# Altium PCB Merge_ESC_Board.PcbDoc (part 2 of 2)
Units mil, origin at the board's own origin, x right, y up, seen from the top; angles counter-clockwise.
Board outline 6950 x 3750 mil, 4 copper layers (Top Layer, Signal Layer 1, Signal Layer 2, Bottom Layer), stack 62.2 mil thick; 151 components, 93 nets, 546 pads, 134 vias.
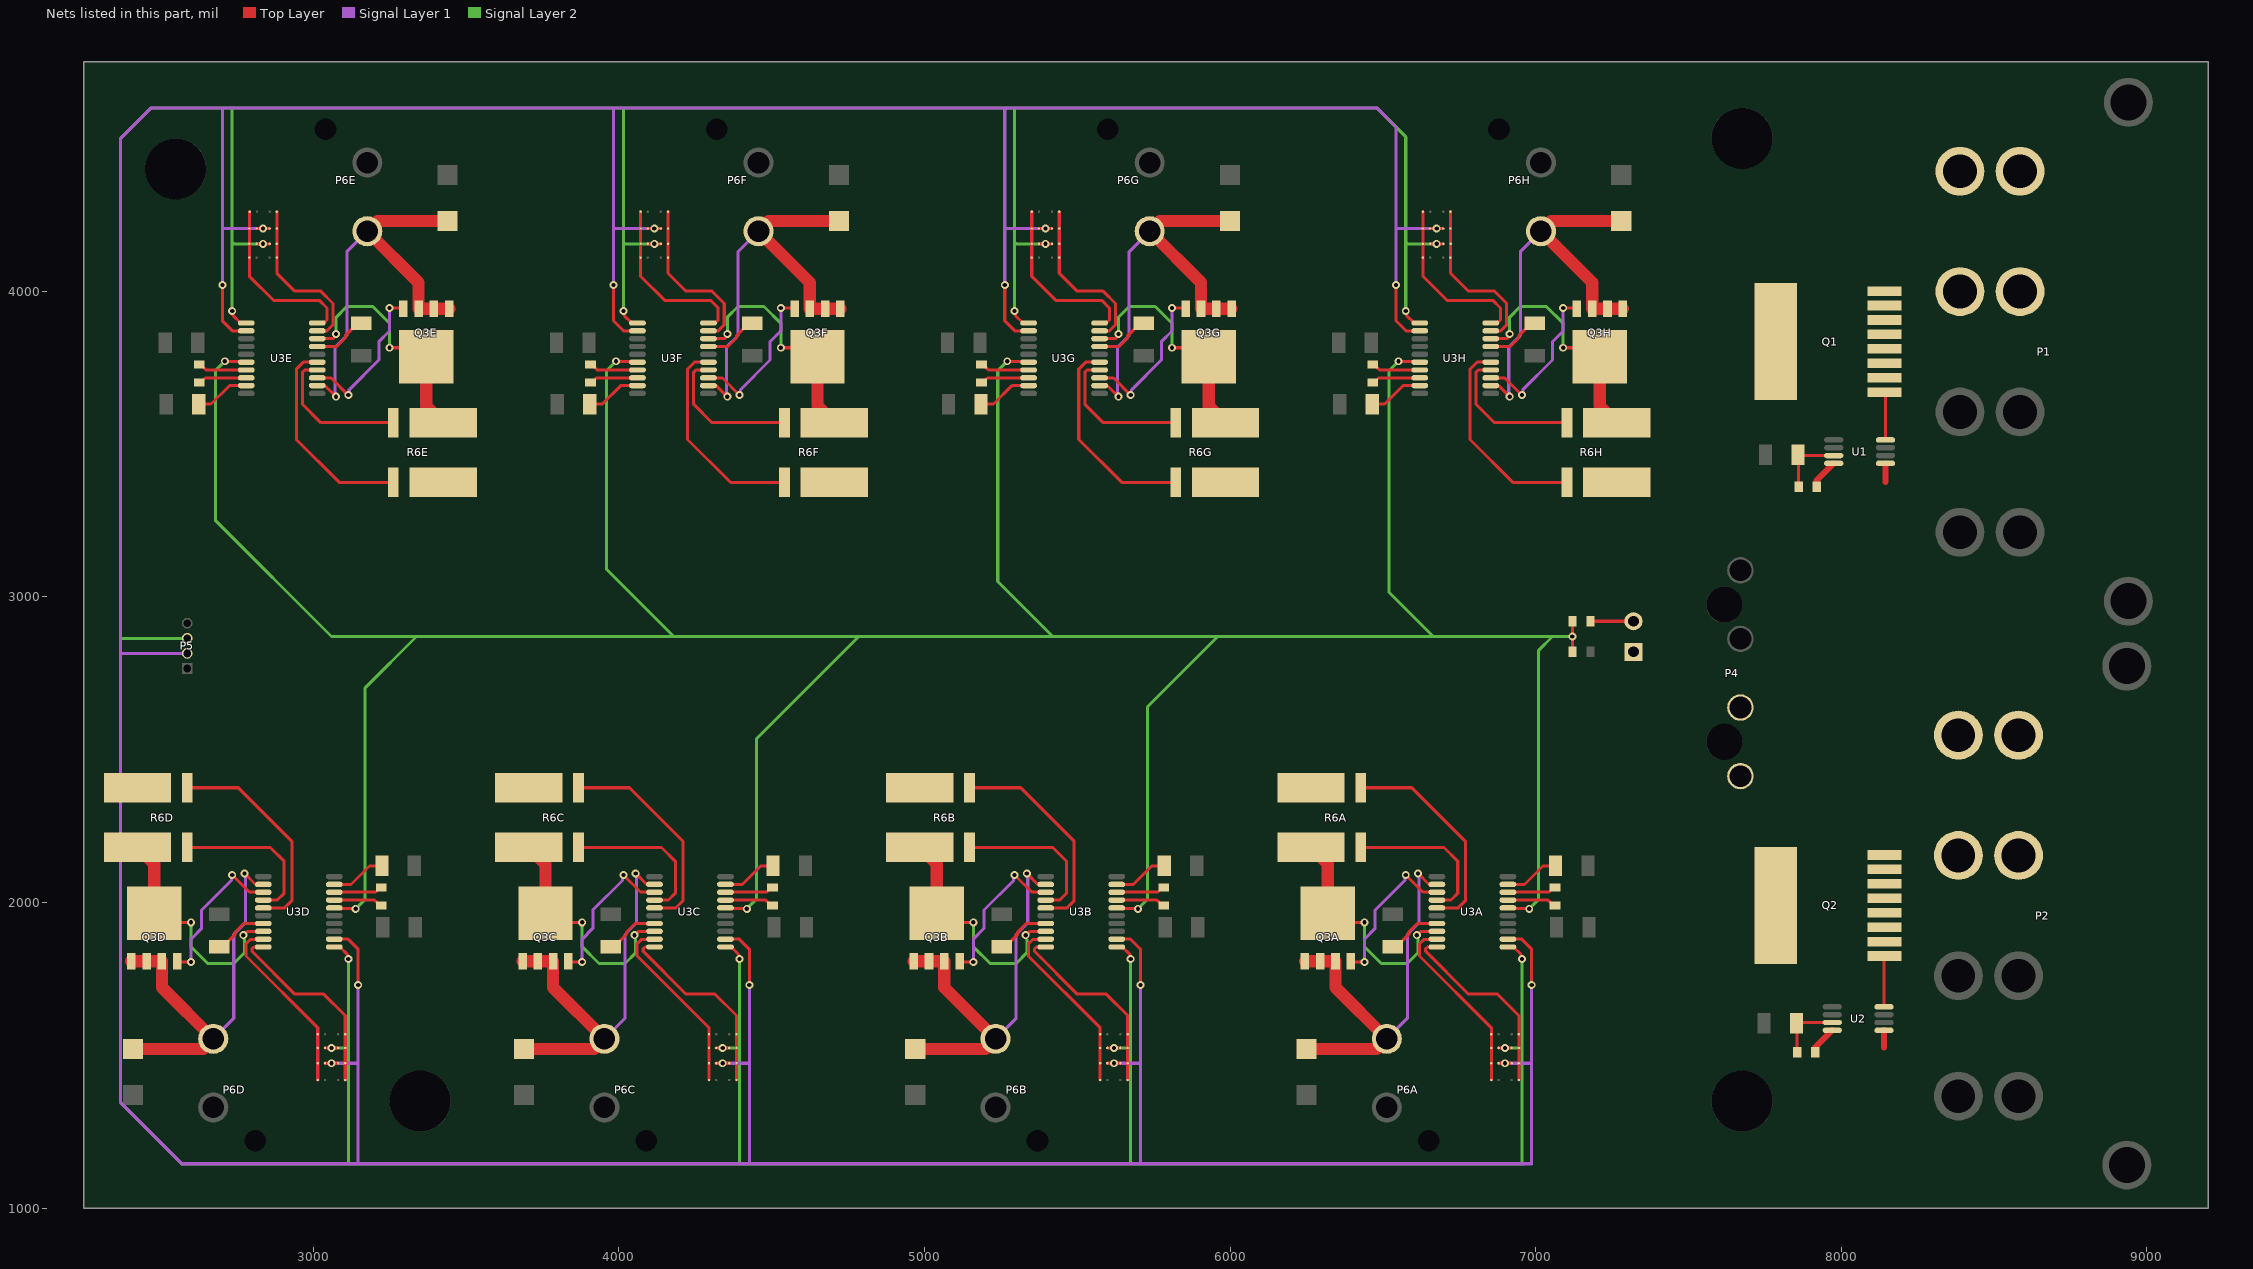
[diagram p4: the nets of this part, all layers, seen from the top]

## Via types
v1: diameter 26, hole 14, Top Layer to Bottom Layer, tented both sides, 102 vias
v2: diameter 26, hole 14, Top Layer to Bottom Layer, 32 vias

## Nets (pads, with @x,y where several pads share a name; then routed paths per layer and width w, separated by ;. In a path a pad name is that pad's centre, name@x,y a point inside that pad or via, vN(x,y) a via of type N, cw(c..) or ccw(c..) an arc to the next point about the centre after c; other vN are vias at no path point) (continued)
K\I\L\L\: R3.1 R4.2 U3A.6 U3B.6 U3C.6 U3D.6 U3E.6 U3F.6 U3G.6 U3H.6 | length 14173.9
  Top Layer w10: v1(2710.95,3770.79) 2712.42,3769.31 2779.47,3769.31 U3E.6@2780.95,3767.83 ; U3D.6@3069.05,1982.17 3070.53,1980.69 3137.58,1980.69 v1(3139.05,1979.21) ; v1(3990.95,3770.79) 3992.42,3769.31 4059.47,3769.31 U3F.6@4060.95,3767.83 ; U3C.6@4349.06,1982.17 4350.53,1980.69 4417.58,1980.69 v1(4419.06,1979.21) ; v1(5270.94,3770.79) 5272.42,3769.31 5339.47,3769.31 U3G.6@5340.94,3767.83 ; U3B.6@5629.06,1982.17 5630.53,1980.69 5697.58,1980.69 v2(5699.06,1979.21) ; v2(6550.94,3770.79) 6552.42,3769.31 6619.47,3769.31 U3H.6@6620.94,3767.83 ; U3A.6@6909.06,1982.17 6910.53,1980.69 6977.58,1980.69 v1(6979.06,1979.21) ; R4.2@7120.47,2820 7120.47,2869.53 v1(7120,2870) 7120,2919.53 R3.1@7120.47,2920
  Signal Layer 2 w10: v1(2710.95,3770.79) 2680,3739.84 2680,3250 3060,2870 3337.8,2870 ; v1(3139.05,1979.21) 3170,2010.16 3170,2702.2 3337.8,2870 ; 3960,3250 3960,3739.84 ; v1(3990.95,3770.79) 3960,3739.84 ; v1(4419.06,1979.21) 4450,2010.16 4450,2535 4785,2870 ; 5240,3250 5240,3739.84 ; v1(5270.94,3770.79) 5240,3739.84 ; v2(5699.06,1979.21) 5730,2010.16 5730,2640 5960,2870 ; 6520,3250 6520,3739.84 ; v2(6550.94,3770.79) 6520,3739.84 ; v1(6979.06,1979.21) 7010,2010.16 7010,2825 7055,2870 ; v1(7120,2870) 7055,2870 ; 3337.8,2870 4180,2870 ; 3960,3739.84 3960,3090 4180,2870 ; 4180,2870 4785,2870 ; 4785,2870 5420,2870 ; 5240,3739.84 5240,3050 5420,2870 ; 5420,2870 5960,2870 ; 5960,2870 6665,2870 ; 6520,3739.84 6520,3015 6665,2870 ; 6665,2870 7055,2870
NetC1_2: C1.2 R1.1 U1.7 | length 221
  Top Layer w10: C1.2@7858.15,3465 C1.2@7860.47,3462.68 ; R1.1@7860.47,3360 C1.2@7860.47,3462.68 ; U1.7@7975.35,3462.2 7860.94,3462.2 C1.2@7860.47,3462.68
NetC2_2: C2.2 R2.1 U2.7 | length 214.1
  Top Layer w10: R2.1@7855.47,1510 7855.47,1602.68 C2.2@7853.15,1605 7855.35,1607.2 U2.7@7970.35,1607.2
NetC3A_2: C3A.2 U3A.9 | length 180.7
  Top Layer w10: U3A.9@6909.06,2058.94 6963.78,2058.94 7024.21,2119.37 C3A.2@7064.76,2119.37
NetC3B_2: C3B.2 U3B.9 | length 180.7
  Top Layer w10: U3B.9@5629.06,2058.94 5683.78,2058.94 5744.21,2119.37 C3B.2@5784.76,2119.37
NetC3C_2: C3C.2 U3C.9 | length 180.7
  Top Layer w10: U3C.9@4349.06,2058.94 4403.78,2058.94 4464.21,2119.37 C3C.2@4504.76,2119.37
NetC3D_2: C3D.2 U3D.9 | length 180.7
  Top Layer w10: U3D.9@3069.05,2058.94 3123.78,2058.94 3184.21,2119.37 C3D.2@3224.76,2119.37
NetC3E_2: C3E.2 U3E.9 | length 180.7
  Top Layer w10: C3E.2@2625.24,3630.63 2665.79,3630.63 2726.22,3691.06 U3E.9@2780.95,3691.06
NetC3F_2: C3F.2 U3F.9 | length 180.7
  Top Layer w10: C3F.2@3905.24,3630.63 3945.79,3630.63 4006.22,3691.06 U3F.9@4060.95,3691.06
NetC3G_2: C3G.2 U3G.9 | length 180.7
  Top Layer w10: C3G.2@5185.24,3630.63 5225.79,3630.63 5286.22,3691.06 U3G.9@5340.94,3691.06
NetC3H_2: C3H.2 U3H.9 | length 180.7
  Top Layer w10: C3H.2@6465.24,3630.63 6505.79,3630.63 6566.22,3691.06 U3H.9@6620.94,3691.06
NetD1A_K: D1A.K P6A.1 Q3A.S U3A.12 | length 1362.3
  Top Layer w10: v1(6615,2095) 6651.06,2058.94 U3A.12@6676.77,2058.94
  Top Layer w40: Q3A.S@6245,1807.28 Q3A.S@6295,1807.28 Q3A.S@6345,1807.28 6345,1721.69 P6A.1@6512.91,1553.78 6479.92,1520.79 D1A.K@6250,1520.79
  Signal Layer 1 w10: P6A.1@6512.91,1553.78 6580,1620.87 6580,1895 6618,1933 6618,2092 v1(6615,2095)
NetD1B_K: D1B.K P6B.1 Q3B.S U3B.12 | length 1362.3
  Top Layer w10: v2(5335,2095) 5371.06,2058.94 U3B.12@5396.77,2058.94
  Top Layer w40: Q3B.S@4965,1807.28 Q3B.S@5015,1807.28 Q3B.S@5065,1807.28 5065,1721.69 P6B.1@5232.91,1553.78 5199.92,1520.79 D1B.K@4970,1520.79
  Signal Layer 1 w10: P6B.1@5232.91,1553.78 5300,1620.87 5300,1895 5338,1933 5338,2092 v2(5335,2095)
NetD1C_K: D1C.K P6C.1 Q3C.S U3C.12 | length 1362.3
  Top Layer w10: v1(4055,2095) 4091.06,2058.94 U3C.12@4116.77,2058.94
  Top Layer w40: Q3C.S@3685,1807.28 Q3C.S@3735,1807.28 Q3C.S@3785,1807.28 3785,1721.69 P6C.1@3952.91,1553.78 3919.92,1520.79 D1C.K@3690,1520.79
  Signal Layer 1 w10: P6C.1@3952.91,1553.78 4020,1620.87 4020,1895 4058,1933 4058,2092 v1(4055,2095)
NetD1D_K: D1D.K P6D.1 Q3D.S U3D.12 | length 1362.3
  Top Layer w10: v1(2775,2095) 2811.06,2058.94 U3D.12@2836.77,2058.94
  Top Layer w40: Q3D.S@2405,1807.28 Q3D.S@2455,1807.28 Q3D.S@2505,1807.28 2505,1721.69 P6D.1@2672.91,1553.78 2639.92,1520.79 D1D.K@2410,1520.79
  Signal Layer 1 w10: P6D.1@2672.91,1553.78 2740,1620.87 2740,1895 2778,1933 2778,2092 v1(2775,2095)
NetD1E_K: D1E.K P6E.1 Q3E.S U3E.12 | length 1362.3
  Top Layer w10: U3E.12@3013.23,3691.06 3038.94,3691.06 v1(3075,3655)
  Top Layer w40: D1E.K@3440,4229.21 3210.08,4229.21 P6E.1@3177.09,4196.22 3345,4028.31 Q3E.S@3345,3942.72 Q3E.S@3395,3942.72 Q3E.S@3445,3942.72
  Signal Layer 1 w10: v1(3075,3655) 3072,3658 3072,3817 3110,3855 3110,4129.13 P6E.1@3177.09,4196.22
NetD1F_K: D1F.K P6F.1 Q3F.S U3F.12 | length 1362.3
  Top Layer w10: U3F.12@4293.23,3691.06 4318.94,3691.06 v1(4355,3655)
  Top Layer w40: D1F.K@4720,4229.21 4490.08,4229.21 P6F.1@4457.09,4196.22 4625,4028.31 Q3F.S@4625,3942.72 Q3F.S@4675,3942.72 Q3F.S@4725,3942.72
  Signal Layer 1 w10: v1(4355,3655) 4352,3658 4352,3817 4390,3855 4390,4129.13 P6F.1@4457.09,4196.22
NetD1G_K: D1G.K P6G.1 Q3G.S U3G.12 | length 1362.3
  Top Layer w10: U3G.12@5573.23,3691.06 5598.94,3691.06 v1(5635,3655)
  Top Layer w40: D1G.K@6000,4229.21 5770.08,4229.21 P6G.1@5737.09,4196.22 5905,4028.31 Q3G.S@5905,3942.72 Q3G.S@5955,3942.72 Q3G.S@6005,3942.72
  Signal Layer 1 w10: v1(5635,3655) 5632,3658 5632,3817 5670,3855 5670,4129.13 P6G.1@5737.09,4196.22
NetD1H_K: D1H.K P6H.1 Q3H.S U3H.12 | length 1362.3
  Top Layer w10: U3H.12@6853.23,3691.06 6878.94,3691.06 v2(6915,3655)
  Top Layer w40: D1H.K@7280,4229.21 7050.08,4229.21 P6H.1@7017.09,4196.22 7185,4028.31 Q3H.S@7185,3942.72 Q3H.S@7235,3942.72 Q3H.S@7285,3942.72
  Signal Layer 1 w10: v2(6915,3655) 6912,3658 6912,3817 6950,3855 6950,4129.13 P6H.1@7017.09,4196.22
NetJ1_1: J1.1 J2.1 J3.1 J4.1 U3A.19 | length 606.4
  Top Layer w10: U3A.19@6676.77,1879.8 6675.3,1878.33 6633.33,1878.33 6620,1865 6620,1825 6855,1590 J4.1@6855,1418.86
NetJ5_1: J5.1 J6.1 J7.1 J8.1 U3C.19 | length 606.4
  Top Layer w10: U3C.19@4116.77,1879.8 4115.3,1878.33 4073.33,1878.33 4060,1865 4060,1825 4295,1590 J8.1@4295,1418.86
NetJ9_1: J9.1 J11.1 J12.1 J13.1 U3E.19 | length 555.9
  Top Layer w10: J13.1@2881.14,4260 J12.1@2881.14,4205 J11.1@2881.14,4155 J9.1@2881.14,4110 2881.14,4058.86 2940,4000 3025,4000 3065,3960 3065,3890 3045.43,3870.43 3013.47,3870.43 U3E.19@3013.23,3870.2
NetJ14_1: J14.1 J15.1 J16.1 J17.1 U3G.19 | length 555.9
  Top Layer w10: J17.1@5441.14,4260 J16.1@5441.14,4205 J15.1@5441.14,4155 J14.1@5441.14,4110 5441.14,4058.86 5500,4000 5585,4000 5625,3960 5625,3890 5605.43,3870.43 5573.47,3870.43 U3G.19@5573.23,3870.2
NetJ18_1: J18.1 J19.1 J20.1 J21.1 U3A.20 | length 650.8
  Top Layer w10: U3A.20@6676.77,1854.21 6645.79,1854.21 6639.93,1848.35 6639.93,1840.07 6780,1700 6875,1700 6945,1630 J21.1@6945,1418.86
NetJ22_1: J22.1 J23.1 J24.1 J25.1 U3C.20 | length 650.8
  Top Layer w10: U3C.20@4116.77,1854.21 4085.79,1854.21 4079.93,1848.35 4079.93,1840.07 4220,1700 4315,1700 4385,1630 J25.1@4385,1418.86
NetJ26_1: J26.1 J27.1 J28.1 J29.1 U3E.20 | length 583.3
  Top Layer w10: J29.1@2791.14,4260 J28.1@2791.14,4205 J27.1@2791.14,4155 J26.1@2791.14,4110 2791.14,4048.86 2870,3970 3020,3970 3045,3945 3045,3905.5 3039.14,3899.65 3037.88,3899.65 3034.02,3895.79 U3E.20@3013.23,3895.79
NetJ30_1: J30.1 J31.1 J32.1 J33.1 U3G.20 | length 583.3
  Top Layer w10: J33.1@5351.14,4260 J32.1@5351.14,4205 J31.1@5351.14,4155 J30.1@5351.14,4110 5351.14,4048.86 5430,3970 5580,3970 5605,3945 5605,3905.5 5599.14,3899.65 5597.88,3899.65 5594.02,3895.79 U3G.20@5573.23,3895.79
NetJ34_1: J34.1 J35.1 J36.1 J37.1 U3B.19 | length 606.4
  Top Layer w10: U3B.19@5396.77,1879.8 5395.3,1878.33 5353.33,1878.33 5340,1865 5340,1825 5575,1590 J37.1@5575,1418.86
NetJ38_1: J38.1 J39.1 J40.1 J41.1 U3D.19 | length 606.4
  Top Layer w10: U3D.19@2836.77,1879.8 2835.3,1878.33 2793.33,1878.33 2780,1865 2780,1825 3015,1590 J41.1@3015,1418.86
NetJ42_1: J42.1 J43.1 J44.1 J45.1 U3F.19 | length 555.9
  Top Layer w10: J45.1@4161.14,4260 J44.1@4161.14,4205 J43.1@4161.14,4155 J42.1@4161.14,4110 4161.14,4058.86 4220,4000 4305,4000 4345,3960 4345,3890 4325.43,3870.43 4293.47,3870.43 U3F.19@4293.23,3870.2
NetJ46_1: J46.1 J47.1 J48.1 J49.1 U3H.19 | length 555.9
  Top Layer w10: J49.1@6721.14,4260 J48.1@6721.14,4205 6721.14,4155 J46.1@6721.14,4110 6721.14,4058.86 6780,4000 6865,4000 6905,3960 6905,3890 6885.43,3870.43 6853.47,3870.43 U3H.19@6853.23,3870.2
NetJ50_1: J50.1 J51.1 J52.1 J53.1 U3B.20 | length 650.8
  Top Layer w10: U3B.20@5396.77,1854.21 5365.79,1854.21 5359.93,1848.35 5359.93,1840.07 5500,1700 5595,1700 5665,1630 J53.1@5665,1418.86
NetJ54_1: J54.1 J55.1 J56.1 J57.1 U3D.20 | length 650.8
  Top Layer w10: U3D.20@2836.77,1854.21 2805.79,1854.21 2799.93,1848.35 2799.93,1840.07 2940,1700 3035,1700 3105,1630 J57.1@3105,1418.86
NetJ58_1: J58.1 J59.1 J60.1 J61.1 U3F.20 | length 583.3
  Top Layer w10: J61.1@4071.14,4260 J60.1@4071.14,4205 J59.1@4071.14,4155 J58.1@4071.14,4110 4071.14,4048.86 4150,3970 4300,3970 4325,3945 4325,3905.5 4319.14,3899.65 4317.88,3899.65 4314.02,3895.79 U3F.20@4293.23,3895.79
NetJ62_1: J62.1 J63.1 J64.1 J65.1 U3H.20 | length 583.3
  Top Layer w10: J65.1@6631.14,4260 J64.1@6631.14,4205 J63.1@6631.14,4155 J62.1@6631.14,4110 6631.14,4048.86 6710,3970 6860,3970 6885,3945 6885,3905.5 6879.14,3899.65 6877.88,3899.65 6874.02,3895.79 U3H.20@6853.23,3895.79
NetP3_2: P3.2 R3.2 | length 140.5
  Top Layer w10: R3.2@7179.53,2920 P3.2@7320,2920
NetQ1_1: Q1.1 U1.4 | length 157.5
  Top Layer w10: Q1.1@8141.67,3669.65 8144.65,3666.67 U1.4@8144.65,3513.39
NetQ2_1: Q2.1 U2.4 | length 167.1
  Top Layer w10: U2.4@8139.65,1658.39 8139.65,1822.62 Q2.1@8141.67,1824.65
NetQ3A_D: Q3A.D R6A.2 U3A.18 | length 792.6
  Top Layer w10: Q3A.D@6320,1965 6350,1935 v1(6440,1935) ; v1(6611.27,1892.91) 6613.87,1895.51 6615,1895.51 6624.88,1905.39 U3A.18@6676.77,1905.39
  Top Layer w40: R6A.2@6265,2180 6320,2125 Q3A.D@6320,1965
  Signal Layer 2 w10: v1(6440,1935) 6440,1855 6495,1800 6580,1800 6615,1835 6615,1879.06 6614.33,1879.73 6614.33,1889.85 v1(6611.27,1892.91)
NetQ3A_G: Q3A.G U3A.13 | length 512.1
  Top Layer w10: Q3A.G@6395,1807.28 6397.28,1805 v1(6440,1805) ; v1(6575,2090) 6630.97,2034.03 6676.09,2034.03 U3A.13@6676.77,2033.35
  Signal Layer 1 w10: v1(6440,1805) 6440,1880 6475,1915 6475,1975 6572,2072 6572,2087 v1(6575,2090)
NetQ3B_D: Q3B.D R6B.2 U3B.18 | length 792.6
  Top Layer w10: Q3B.D@5040,1965 5070,1935 v2(5160,1935) ; v2(5331.27,1892.91) 5333.87,1895.51 5335,1895.51 5344.88,1905.39 U3B.18@5396.77,1905.39
  Top Layer w40: R6B.2@4985,2180 5040,2125 Q3B.D@5040,1965
  Signal Layer 2 w10: v2(5160,1935) 5160,1855 5215,1800 5300,1800 5335,1835 5335,1879.06 5334.33,1879.73 5334.33,1889.85 v2(5331.27,1892.91)
NetQ3B_G: Q3B.G U3B.13 | length 512.1
  Top Layer w10: Q3B.G@5115,1807.28 5117.28,1805 v2(5160,1805) ; v2(5295,2090) 5350.97,2034.03 5396.09,2034.03 U3B.13@5396.77,2033.35
  Signal Layer 1 w10: v2(5160,1805) 5160,1880 5195,1915 5195,1975 5292,2072 5292,2087 v2(5295,2090)
NetQ3C_D: Q3C.D R6C.2 U3C.18 | length 792.6
  Top Layer w10: Q3C.D@3760,1965 3790,1935 v1(3880,1935) ; v1(4051.27,1892.91) 4053.87,1895.51 4055,1895.51 4064.88,1905.39 U3C.18@4116.77,1905.39
  Top Layer w40: R6C.2@3705,2180 3760,2125 Q3C.D@3760,1965
  Signal Layer 2 w10: v1(3880,1935) 3880,1855 3935,1800 4020,1800 4055,1835 4055,1879.06 4054.33,1879.73 4054.33,1889.85 v1(4051.27,1892.91)
NetQ3C_G: Q3C.G U3C.13 | length 512.1
  Top Layer w10: Q3C.G@3835,1807.28 3837.28,1805 v1(3880,1805) ; v1(4015,2090) 4070.97,2034.03 4116.09,2034.03 U3C.13@4116.77,2033.35
  Signal Layer 1 w10: v1(3880,1805) 3880,1880 3915,1915 3915,1975 4012,2072 4012,2087 v1(4015,2090)
NetQ3D_D: Q3D.D R6D.2 U3D.18 | length 792.6
  Top Layer w10: Q3D.D@2480,1965 2510,1935 v1(2600,1935) ; v1(2771.27,1892.91) 2773.87,1895.51 2775,1895.51 2784.88,1905.39 U3D.18@2836.77,1905.39
  Top Layer w40: R6D.2@2425,2180 2480,2125 Q3D.D@2480,1965
  Signal Layer 2 w10: v1(2600,1935) 2600,1855 2655,1800 2740,1800 2775,1835 2775,1879.06 2774.33,1879.73 2774.33,1889.85 v1(2771.27,1892.91)
NetQ3D_G: Q3D.G U3D.13 | length 512.1
  Top Layer w10: Q3D.G@2555,1807.28 2557.28,1805 v1(2600,1805) ; v1(2735,2090) 2790.97,2034.03 2836.09,2034.03 U3D.13@2836.77,2033.35
  Signal Layer 1 w10: v1(2600,1805) 2600,1880 2635,1915 2635,1975 2732,2072 2732,2087 v1(2735,2090)
NetQ3E_D: Q3E.D R6E.2 U3E.18 | length 788.9
  Top Layer w10: U3E.18@3013.23,3844.61 3065.12,3844.61 3075,3854.49 v1(3075,3859.74) ; v1(3250,3815) 3340,3815 Q3E.D@3370,3785
  Top Layer w40: Q3E.D@3370,3785 3370,3625 R6E.2@3425,3570
  Signal Layer 2 w10: v1(3075,3859.74) 3075,3915 3110,3950 3195,3950 3250,3895 v1(3250,3815)
NetQ3E_G: Q3E.G U3E.13 | length 512.1
  Top Layer w10: U3E.13@3013.23,3716.65 3013.91,3715.97 3059.03,3715.97 v1(3115,3660) ; v1(3250,3945) 3292.72,3945 Q3E.G@3295,3942.72
  Signal Layer 1 w10: v1(3115,3660) 3118,3663 3118,3678 3215,3775 3215,3835 3250,3870 v1(3250,3945)
NetQ3F_D: Q3F.D R6F.2 U3F.18 | length 788.9
  Top Layer w10: U3F.18@4293.23,3844.61 4345.12,3844.61 4355,3854.49 v1(4355,3859.74) ; v1(4530,3815) 4620,3815 Q3F.D@4650,3785
  Top Layer w40: Q3F.D@4650,3785 4650,3625 R6F.2@4705,3570
  Signal Layer 2 w10: v1(4355,3859.74) 4355,3915 4390,3950 4475,3950 4530,3895 v1(4530,3815)
NetQ3F_G: Q3F.G U3F.13 | length 512.1
  Top Layer w10: U3F.13@4293.23,3716.65 4293.91,3715.97 4339.03,3715.97 v1(4395,3660) ; v1(4530,3945) 4572.72,3945 Q3F.G@4575,3942.72
  Signal Layer 1 w10: v1(4395,3660) 4398,3663 4398,3678 4495,3775 4495,3835 4530,3870 v1(4530,3945)
NetQ3G_D: Q3G.D R6G.2 U3G.18 | length 788.9
  Top Layer w10: U3G.18@5573.23,3844.61 5625.12,3844.61 5635,3854.49 v1(5635,3859.74) ; v1(5810,3815) 5900,3815 Q3G.D@5930,3785
  Top Layer w40: Q3G.D@5930,3785 5930,3625 R6G.2@5985,3570
  Signal Layer 2 w10: v1(5635,3859.74) 5635,3915 5670,3950 5755,3950 5810,3895 v1(5810,3815)
NetQ3G_G: Q3G.G U3G.13 | length 512.1
  Top Layer w10: U3G.13@5573.23,3716.65 5573.91,3715.97 5619.03,3715.97 v1(5675,3660) ; v1(5810,3945) 5852.72,3945 Q3G.G@5855,3942.72
  Signal Layer 1 w10: v1(5675,3660) 5678,3663 5678,3678 5775,3775 5775,3835 5810,3870 v1(5810,3945)
NetQ3H_D: Q3H.D R6H.2 U3H.18 | length 788.9
  Top Layer w10: U3H.18@6853.23,3844.61 6905.12,3844.61 6915,3854.49 v2(6915,3859.74) ; v2(7090,3815) 7180,3815 Q3H.D@7210,3785
  Top Layer w40: Q3H.D@7210,3785 7210,3625 R6H.2@7265,3570
  Signal Layer 2 w10: v2(6915,3859.74) 6915,3915 6950,3950 7035,3950 7090,3895 v2(7090,3815)
NetQ3H_G: Q3H.G U3H.13 | length 512.1
  Top Layer w10: U3H.13@6853.23,3716.65 6853.91,3715.97 6899.03,3715.97 v2(6955,3660) ; v2(7090,3945) 7132.72,3945 Q3H.G@7135,3942.72
  Signal Layer 1 w10: v2(6955,3660) 6958,3663 6958,3678 7055,3775 7055,3835 7090,3870 v2(7090,3945)
NetR5A_1: R5A.1 U3A.8 | length 160.3
  Top Layer w10: U3A.8@6909.06,2033.35 6909.92,2034.21 7044.29,2034.21 7058.98,2048.9 R5A.1@7062.91,2048.9
NetR5A_2: R5A.2 U3A.7 | length 161.3
  Top Layer w10: U3A.7@6909.06,2007.76 7040.51,2007.76 7044.06,2004.21 7044.61,2004.21 7058.98,1989.84 R5A.2@7062.91,1989.84
NetR5B_1: R5B.1 U3B.8 | length 160.3
  Top Layer w10: U3B.8@5629.06,2033.35 5629.92,2034.21 5764.29,2034.21 5778.98,2048.9 R5B.1@5782.91,2048.9
NetR5B_2: R5B.2 U3B.7 | length 161.3
  Top Layer w10: U3B.7@5629.06,2007.76 5760.51,2007.76 5764.06,2004.21 5764.61,2004.21 5778.98,1989.84 R5B.2@5782.91,1989.84
NetR5C_1: R5C.1 U3C.8 | length 160.3
  Top Layer w10: U3C.8@4349.06,2033.35 4349.92,2034.21 4484.29,2034.21 4498.98,2048.9 R5C.1@4502.91,2048.9
NetR5C_2: R5C.2 U3C.7 | length 161.3
  Top Layer w10: U3C.7@4349.06,2007.76 4480.51,2007.76 4484.06,2004.21 4484.61,2004.21 4498.98,1989.84 R5C.2@4502.91,1989.84
NetR5D_1: R5D.1 U3D.8 | length 160.3
  Top Layer w10: U3D.8@3069.05,2033.35 3069.92,2034.21 3204.29,2034.21 3218.98,2048.9 R5D.1@3222.91,2048.9
NetR5D_2: R5D.2 U3D.7 | length 161.3
  Top Layer w10: U3D.7@3069.05,2007.76 3200.51,2007.76 3204.05,2004.21 3204.61,2004.21 3218.98,1989.84 R5D.2@3222.91,1989.84
NetR5E_1: R5E.1 U3E.8 | length 160.3
  Top Layer w10: R5E.1@2627.09,3701.1 2631.02,3701.1 2645.71,3715.79 2780.08,3715.79 U3E.8@2780.95,3716.65
NetR5E_2: R5E.2 U3E.7 | length 161.3
  Top Layer w10: R5E.2@2627.09,3760.16 2631.02,3760.16 2645.39,3745.79 2645.95,3745.79 2649.49,3742.24 U3E.7@2780.95,3742.24
NetR5F_1: R5F.1 U3F.8 | length 160.3
  Top Layer w10: R5F.1@3907.09,3701.1 3911.02,3701.1 3925.71,3715.79 4060.08,3715.79 U3F.8@4060.95,3716.65
NetR5F_2: R5F.2 U3F.7 | length 161.3
  Top Layer w10: R5F.2@3907.09,3760.16 3911.02,3760.16 3925.39,3745.79 3925.95,3745.79 3929.49,3742.24 U3F.7@4060.95,3742.24
NetR5G_1: R5G.1 U3G.8 | length 160.3
  Top Layer w10: R5G.1@5187.09,3701.1 5191.02,3701.1 5205.71,3715.79 5340.08,3715.79 U3G.8@5340.94,3716.65
NetR5G_2: R5G.2 U3G.7 | length 161.3
  Top Layer w10: R5G.2@5187.09,3760.16 5191.02,3760.16 5205.39,3745.79 5205.94,3745.79 5209.49,3742.24 U3G.7@5340.94,3742.24
NetR5H_1: R5H.1 U3H.8 | length 160.3
  Top Layer w10: R5H.1@6467.09,3701.1 6471.02,3701.1 6485.71,3715.79 6620.08,3715.79 U3H.8@6620.94,3716.65
NetR5H_2: R5H.2 U3H.7 | length 161.3
  Top Layer w10: R5H.2@6467.09,3760.16 6471.02,3760.16 6485.39,3745.79 6485.94,3745.79 6489.49,3742.24 U3H.7@6620.94,3742.24
NetR6A_3: R6A.3 U3A.15 | length 712.5
  Top Layer w10: R6A.3@6427.8,2375.28 6594.72,2375.28 6770,2200 6770,2005 6747.17,1982.17 U3A.15@6676.77,1982.17
NetR6A_4: R6A.4 U3A.14 | length 518.3
  Top Layer w10: R6A.4@6427.8,2180 6700,2180 6745,2135 6745,2030 6722.76,2007.76 U3A.14@6676.77,2007.76
NetR6B_3: R6B.3 U3B.15 | length 712.5
  Top Layer w10: R6B.3@5147.8,2375.28 5314.72,2375.28 5490,2200 5490,2005 5467.17,1982.17 U3B.15@5396.77,1982.17
NetR6B_4: R6B.4 U3B.14 | length 518.3
  Top Layer w10: R6B.4@5147.8,2180 5420,2180 5465,2135 5465,2030 5442.76,2007.76 U3B.14@5396.77,2007.76
NetR6C_3: R6C.3 U3C.15 | length 712.5
  Top Layer w10: R6C.3@3867.8,2375.28 4034.72,2375.28 4210,2200 4210,2005 4187.17,1982.17 U3C.15@4116.77,1982.17
NetR6C_4: R6C.4 U3C.14 | length 518.3
  Top Layer w10: R6C.4@3867.8,2180 4140,2180 4185,2135 4185,2030 4162.76,2007.76 U3C.14@4116.77,2007.76
NetR6D_3: R6D.3 U3D.15 | length 712.5
  Top Layer w10: R6D.3@2587.8,2375.28 2754.72,2375.28 2930,2200 2930,2005 2907.17,1982.17 U3D.15@2836.77,1982.17
NetR6D_4: R6D.4 U3D.14 | length 518.3
  Top Layer w10: R6D.4@2587.8,2180 2860,2180 2905,2135 2905,2030 2882.76,2007.76 U3D.14@2836.77,2007.76
NetR6E_3: R6E.3 U3E.15 | length 683
  Top Layer w10: U3E.15@3013.23,3767.83 2967.83,3767.83 2945,3745 2945,3515 3085.28,3374.72 R6E.3@3262.2,3374.72
NetR6E_4: R6E.4 U3E.14 | length 478.3
  Top Layer w10: U3E.14@3013.23,3742.24 2972.24,3742.24 2965,3735 2965,3630 3025,3570 R6E.4@3262.2,3570
NetR6F_3: R6F.3 U3F.15 | length 683
  Top Layer w10: U3F.15@4293.23,3767.83 4247.83,3767.83 4225,3745 4225,3515 4365.28,3374.72 R6F.3@4542.2,3374.72
NetR6F_4: R6F.4 U3F.14 | length 478.3
  Top Layer w10: U3F.14@4293.23,3742.24 4252.24,3742.24 4245,3735 4245,3630 4305,3570 R6F.4@4542.2,3570
NetR6G_3: R6G.3 U3G.15 | length 683
  Top Layer w10: U3G.15@5573.23,3767.83 5527.83,3767.83 5505,3745 5505,3515 5645.28,3374.72 R6G.3@5822.2,3374.72
NetR6G_4: R6G.4 U3G.14 | length 478.3
  Top Layer w10: U3G.14@5573.23,3742.24 5532.24,3742.24 5525,3735 5525,3630 5585,3570 R6G.4@5822.2,3570
NetR6H_3: R6H.3 U3H.15 | length 683
  Top Layer w10: U3H.15@6853.23,3767.83 6807.83,3767.83 6785,3745 6785,3515 6925.28,3374.72 R6H.3@7102.2,3374.72
NetR6H_4: R6H.4 U3H.14 | length 478.3
  Top Layer w10: U3H.14@6853.23,3742.24 6812.24,3742.24 6805,3735 6805,3630 6865,3570 R6H.4@7102.2,3570
SCL: J3.2 J7.2 J12.2 J16.2 J20.2 J24.2 J28.2 J32.2 J36.2 J40.2 J44.2 J48.2 J52.2 J56.2 J60.2 J64.2 P5.2 U3A.2 U3B.2 U3C.2 U3D.2 U3E.2 U3F.2 U3G.2 U3H.2 | length 19826.7
  Top Layer w10: v1@2703.7,4020.79 v1(2702.91,4020) 2702.91,3902.87 2735.59,3870.2 U3E.2@2780.95,3870.2 ; J28.2@2814.76,4205 v1(2836.14,4205) J12.2@2857.52,4205 ; J40.2@3038.62,1473.86 v1(3060,1473.86) J56.2@3081.38,1473.86 ; U3D.2@3069.05,1879.8 3114.41,1879.8 3147.09,1847.13 v1(3147.09,1730) v1@3146.3,1729.21 ; v1@3983.7,4020.79 v1(3982.91,4020) 3982.91,3902.87 4015.59,3870.2 U3F.2@4060.95,3870.2 ; J60.2@4094.76,4205 v1(4116.14,4205) J44.2@4137.52,4205 ; J7.2@4318.62,1473.86 v1(4340,1473.86) J24.2@4361.38,1473.86 ; U3C.2@4349.06,1879.8 4394.41,1879.8 4427.09,1847.13 v1(4427.09,1730) v1@4426.3,1729.21 ; v1@5263.7,4020.79 v1(5262.91,4020) 5262.91,3902.87 5295.59,3870.2 U3G.2@5340.94,3870.2 ; J32.2@5374.76,4205 v1(5396.14,4205) J16.2@5417.52,4205 ; J36.2@5598.62,1473.86 v2(5620,1473.86) J52.2@5641.38,1473.86 ; U3B.2@5629.06,1879.8 5674.41,1879.8 5707.09,1847.13 v2(5707.09,1730) v2@5706.3,1729.21 ; v2@6543.7,4020.79 v2(6542.91,4020) 6542.91,3902.87 6575.59,3870.2 U3H.2@6620.94,3870.2 ; J64.2@6654.76,4205 v2(6676.14,4205) J48.2@6697.52,4205 ; J3.2@6878.62,1473.86 v1(6900,1473.86) J20.2@6921.38,1473.86 ; U3A.2@6909.06,1879.8 6954.41,1879.8 6987.09,1847.13 v1(6987.09,1730) v1@6986.3,1729.21
  Signal Layer 1 w10: P5.2@2587.8,2815 2370,2815 ; v1(2702.91,4020) 2702.91,4205 ; v1(2836.14,4205) 2702.91,4205 ; v1(3060,1473.86) 3145.94,1473.86 3147.09,1475 ; v1(3147.09,1730) 3147.09,1475 ; v1(3982.91,4020) 3982.91,4205 ; v1(4116.14,4205) 3982.91,4205 ; v1(4340,1473.86) 4425.94,1473.86 4427.09,1475 ; v1(4427.09,1730) 4427.09,1475 ; v1(5262.91,4020) 5262.91,4205 ; v1(5396.14,4205) 5262.91,4205 ; v2(5620,1473.86) 5705.94,1473.86 5707.09,1475 ; v2(5707.09,1730) 5707.09,1475 ; v2(6542.91,4020) 6542.91,4205 ; v2(6676.14,4205) 6542.91,4205 ; v1(6900,1473.86) 6985.94,1473.86 6987.09,1475 ; v1(6987.09,1730) 6987.09,1475 ; 2370,2815 2370,1345 2570,1145 3147.09,1145 ; 2370,2815 2370,4500 2470,4600 2702.91,4600 ; 2702.91,4205 2702.91,4600 ; 2702.91,4600 3982.91,4600 ; 3147.09,1145 4427.09,1145 ; 3147.09,1145 3147.09,1475 ; 3982.91,4205 3982.91,4600 ; 3982.91,4600 5262.91,4600 ; 4427.09,1145 5707.09,1145 ; 4427.09,1145 4427.09,1475 ; 5262.91,4205 5262.91,4600 ; 5262.91,4600 6480,4600 6542.91,4537.09 6542.91,4205 ; 5707.09,1145 6987.09,1145 6987.09,1475 ; 5707.09,1145 5707.09,1475
  Signal Layer 2 w10: P5.2@2575,2815 P5.2@2587.8,2815
SDA: J2.2 J6.2 J11.2 J15.2 J19.2 J23.2 J27.2 J31.2 J35.2 J39.2 J43.2 J47.2 J51.2 J55.2 J59.2 J63.2 P5.3 U3A.1 U3B.1 U3C.1 U3D.1 U3E.1 U3F.1 U3G.1 U3H.1 | length 19115.1
  Top Layer w10: v1(2735,3935) 2738.06,3931.94 2738.06,3919.97 2762.24,3895.79 U3E.1@2780.95,3895.79 ; J27.2@2814.76,4155 v1(2836.14,4155) J11.2@2857.52,4155 ; J39.2@3038.62,1523.86 v1(3060,1523.86) J55.2@3081.38,1523.86 ; U3D.1@3069.05,1854.21 3087.76,1854.21 3111.94,1830.03 3111.94,1818.06 v1(3115,1815) ; v1(4015,3935) 4018.06,3931.94 4018.06,3919.97 4042.24,3895.79 U3F.1@4060.95,3895.79 ; J59.2@4094.76,4155 v1(4116.14,4155) J43.2@4137.52,4155 ; J6.2@4318.62,1523.86 v1(4340,1523.86) J23.2@4361.38,1523.86 ; U3C.1@4349.06,1854.21 4367.76,1854.21 4391.94,1830.03 4391.94,1818.06 v1(4395,1815) ; v1(5295,3935) 5298.06,3931.94 5298.06,3919.97 5322.24,3895.79 U3G.1@5340.94,3895.79 ; J31.2@5374.76,4155 v1(5396.14,4155) J15.2@5417.52,4155 ; J35.2@5598.62,1523.86 v2(5620,1523.86) J51.2@5641.38,1523.86 ; U3B.1@5629.06,1854.21 5647.76,1854.21 5671.94,1830.03 5671.94,1818.06 v2(5675,1815) ; v2(6575,3935) 6578.06,3931.94 6578.06,3919.97 6602.24,3895.79 U3H.1@6620.94,3895.79 ; J63.2@6654.76,4155 v2(6676.14,4155) J47.2@6697.52,4155 ; J2.2@6878.62,1523.86 v1(6900,1523.86) J19.2@6921.38,1523.86 ; U3A.1@6909.06,1854.21 6927.76,1854.21 6951.94,1830.03 6951.94,1818.06 v1(6955,1815)
  Signal Layer 2 w10: P5.3@2587.8,2864.21 2370,2864.21 ; v1(2735,3935) 2735,4160 ; v1(2836.14,4155) 2740,4155 2735,4160 ; v1(3060,1523.86) 3113.86,1523.86 3115,1525 ; v1(3115,1815) 3115,1525 ; v1(4015,3935) 4015,4160 ; v1(4116.14,4155) 4020,4155 4015,4160 ; v1(4340,1523.86) 4393.86,1523.86 4395,1525 ; v1(4395,1815) 4395,1525 ; v1(5295,3935) 5295,4160 ; v1(5396.14,4155) 5300,4155 5295,4160 ; v2(5620,1523.86) 5673.86,1523.86 5675,1525 ; v2(5675,1815) 5675,1525 ; v2(6575,3935) 6575,4160 ; v2(6676.14,4155) 6580,4155 6575,4160 ; v1(6900,1523.86) 6953.86,1523.86 6955,1525 ; v1(6955,1815) 6955,1525 ; 2370,2864.21 2370,1345 2570,1145 3120,1145 ; 2370,2864.21 2370,4500 2470,4600 2735,4600 ; 2735,4160 2735,4600 ; 2735,4600 4015,4600 ; 3115,1525 3115,1150 3120,1145 ; 3120,1145 4400,1145 ; 4015,4160 4015,4600 ; 4015,4600 5295,4600 ; 4395,1525 4395,1150 4400,1145 ; 4400,1145 5680,1145 ; 5295,4160 5295,4600 ; 5295,4600 6480,4600 6575,4505 6575,4160 ; 5675,1525 5675,1150 5680,1145 ; 5680,1145 6960,1145 6955,1150 6955,1525
VBAT_4S_1: P1.3 P1.4 Q1.2 Q1.3 Q1.4 Q1.5 Q1.6 Q1.7 Q1.8 U1.1 | length 61.8
  Top Layer w10: 8144.65,3375.35 8145,3375
  Top Layer w20: 8144.65,3375.35 U1.1@8144.65,3436.61
VBAT_4S_2: P2.3 P2.4 Q2.2 Q2.3 Q2.4 Q2.5 Q2.6 Q2.7 Q2.8 U2.1 | length 56.8
  Top Layer w10: 8139.65,1525.35 8140,1525
  Top Layer w20: 8139.65,1525.35 U2.1@8139.65,1581.61
VBAT_4S_MERGE: C5A.2 C5B.2 C5C.2 C5D.2 C5E.2 C5F.2 C5G.2 C5H.2 P3.1 P4.3 P4.4 Q1.9 Q2.9 R1.2 R2.2 R6A.1 R6B.1 R6C.1 R6D.1 R6E.1 R6F.1 R6G.1 R6H.1 U1.8 U2.8 U3A.17 U3B.17 U3C.17 U3D.17 U3E.17 U3F.17 U3G.17 U3H.17 | length 1631.3
  Top Layer w10: C5D.2@2692.91,1855.28 2704.72,1855.28 2744.88,1895.43 2744.88,1902.92 2772.95,1930.98 U3D.17@2836.77,1930.98 ; U3E.17@3013.23,3819.02 3077.05,3819.02 3105.12,3847.08 3105.12,3854.57 3145.28,3894.72 C5E.2@3157.09,3894.72 ; C5C.2@3972.91,1855.28 3984.72,1855.28 4024.88,1895.43 4024.88,1902.92 4052.95,1930.98 U3C.17@4116.77,1930.98 ; U3F.17@4293.23,3819.02 4357.05,3819.02 4385.12,3847.08 4385.12,3854.57 4425.28,3894.72 C5F.2@4437.09,3894.72 ; C5B.2@5252.91,1855.28 5264.72,1855.28 5304.88,1895.43 5304.88,1902.92 5332.95,1930.98 U3B.17@5396.77,1930.98 ; U3G.17@5573.23,3819.02 5637.05,3819.02 5665.12,3847.08 5665.12,3854.57 5705.28,3894.72 C5G.2@5717.09,3894.72 ; C5A.2@6532.91,1855.28 6544.72,1855.28 6584.88,1895.43 6584.88,1902.92 6612.95,1930.98 U3A.17@6676.77,1930.98 ; U3H.17@6853.23,3819.02 6917.05,3819.02 6945.12,3847.08 6945.12,3854.57 6985.28,3894.72 C5H.2@6997.09,3894.72
  Top Layer w20: R2.2@7914.53,1510 7914.53,1525.79 U2.8@7970.35,1581.61 ; R1.2@7919.53,3360 7919.53,3380.79 U1.8@7975.35,3436.61
pads on no net: P1. P2. P4. P6A. P6B. P6C. P6D. P6E. P6F. P6G. P6H. U3A.3 U3A.5 U3A.11 U3B.3 U3B.5 U3B.11 U3C.3 U3C.5 U3C.11 U3D.3 U3D.5 U3D.11 U3E.3 U3E.5 U3E.11 U3F.3 U3F.5 U3F.11 U3G.3 U3G.5 U3G.11 U3H.3 U3H.5 U3H.11

## Polygon pours and split planes (outlines as drawn)
VBAT_4S_MERGE on Top Layer "Vbat_TOP" (solid, pour order 8): 8000,1025 8000,4725 2275,4725 2275,1025
VBAT_4S_2 on Top Layer "Top Layer-NetP2_3" (solid, pour order 2): 8050,2875 9175,2875 9175,1025 8050,1025
VBAT_4S_1 on Top Layer "Top Layer-NetP1_3" (solid, pour order 0): 8050,2900 9175,2900 9175,4725 8050,4725
GND on Bottom Layer "GND" (solid, pour order 10): 9175,1025 9175,4725 2275,4725 2275,1025

## Keep-outs
Keep-Out Layer:
  the board outline again, w10

## Dimensions
2250,1000 to 9200,1000 on Mechanical 13
2250,1000 to 2250,4750 on Mechanical 13

## Text inside footprints (layer, text, board x,y; h text height)
D1A: Top Overlay "A" at 6262.8,1411.34 h31.5 r90; Top Overlay "K" at 6262.8,1458.58 h31.5 r90
D1B: Top Overlay "K" at 4982.8,1458.58 h31.5 r90; Top Overlay "A" at 4982.8,1411.34 h31.5 r90
D1C: Top Overlay "A" at 3702.8,1411.34 h31.5 r90; Top Overlay "K" at 3702.8,1458.58 h31.5 r90
D1D: Top Overlay "K" at 2422.8,1458.58 h31.5 r90; Top Overlay "A" at 2422.8,1411.34 h31.5 r90
D1E: Top Overlay "A" at 3427.2,4338.66 h31.5 r270; Top Overlay "K" at 3427.2,4291.42 h31.5 r270
D1F: Top Overlay "K" at 4707.2,4291.42 h31.5 r270; Top Overlay "A" at 4707.2,4338.66 h31.5 r270
D1G: Top Overlay "A" at 5987.2,4338.66 h31.5 r270; Top Overlay "K" at 5987.2,4291.42 h31.5 r270
D1H: Top Overlay "K" at 7267.2,4291.42 h31.5 r270; Top Overlay "A" at 7267.2,4338.66 h31.5 r270